# Altium PCB PCB1.PcbDoc
Units mm, origin at the board's own origin, x right, y up, seen from the top; angles counter-clockwise.
Board outline 52.5 x 34.6 mm, 4 copper layers (Top Layer, GND, Mid-Layer 1, Bottom Layer); 31 components, 42 nets, 287 pads, 133 vias.
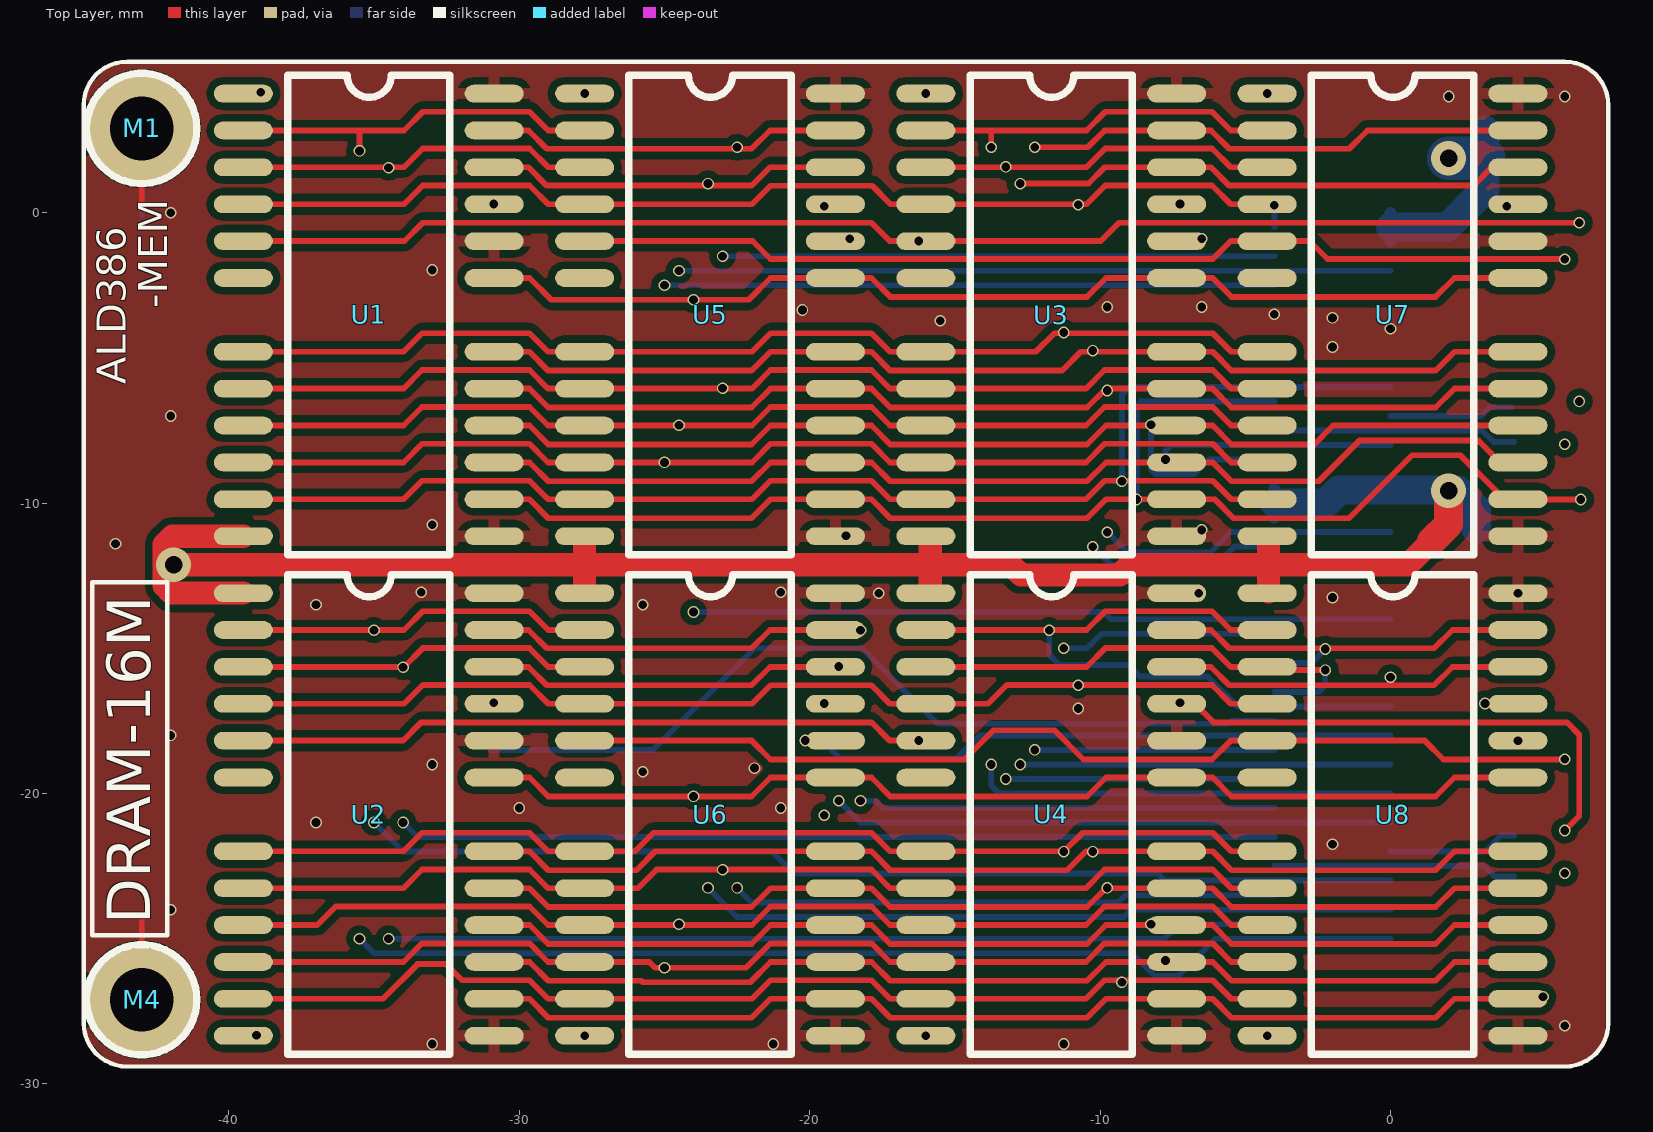
[diagram p0: Top Layer view]
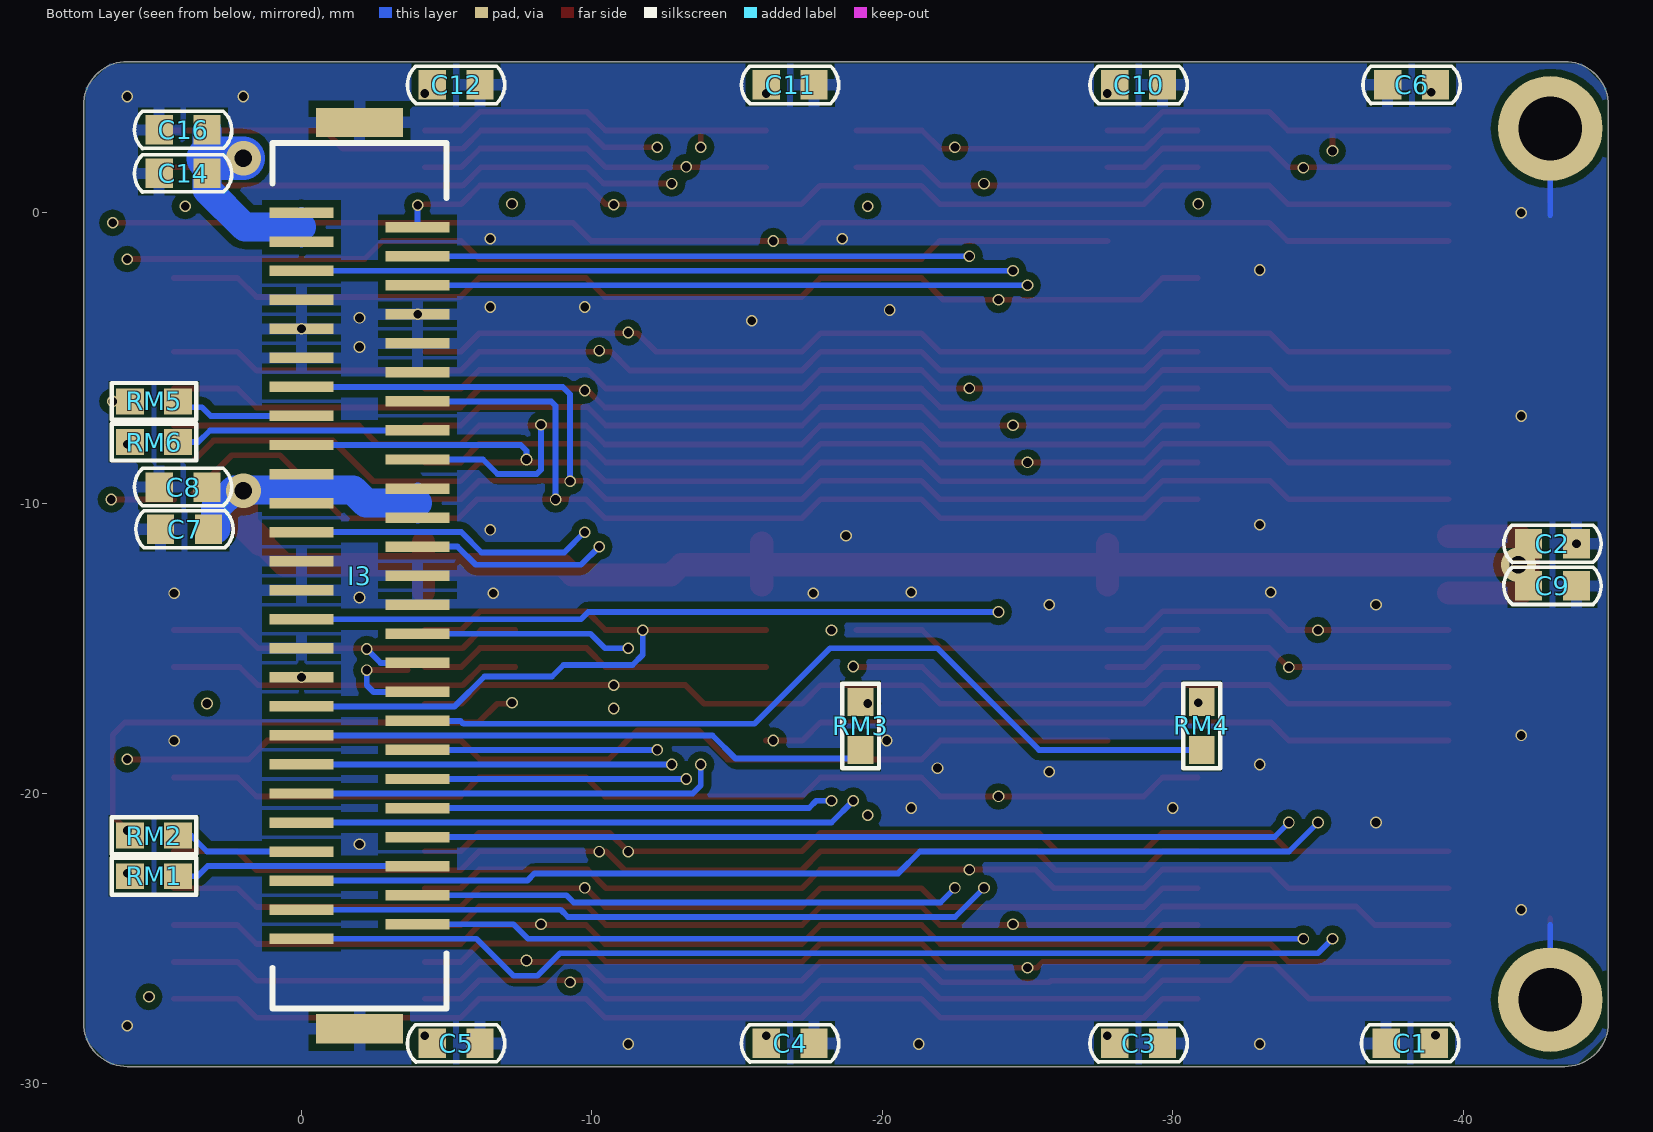
[diagram p1: Bottom Layer view, seen from below]
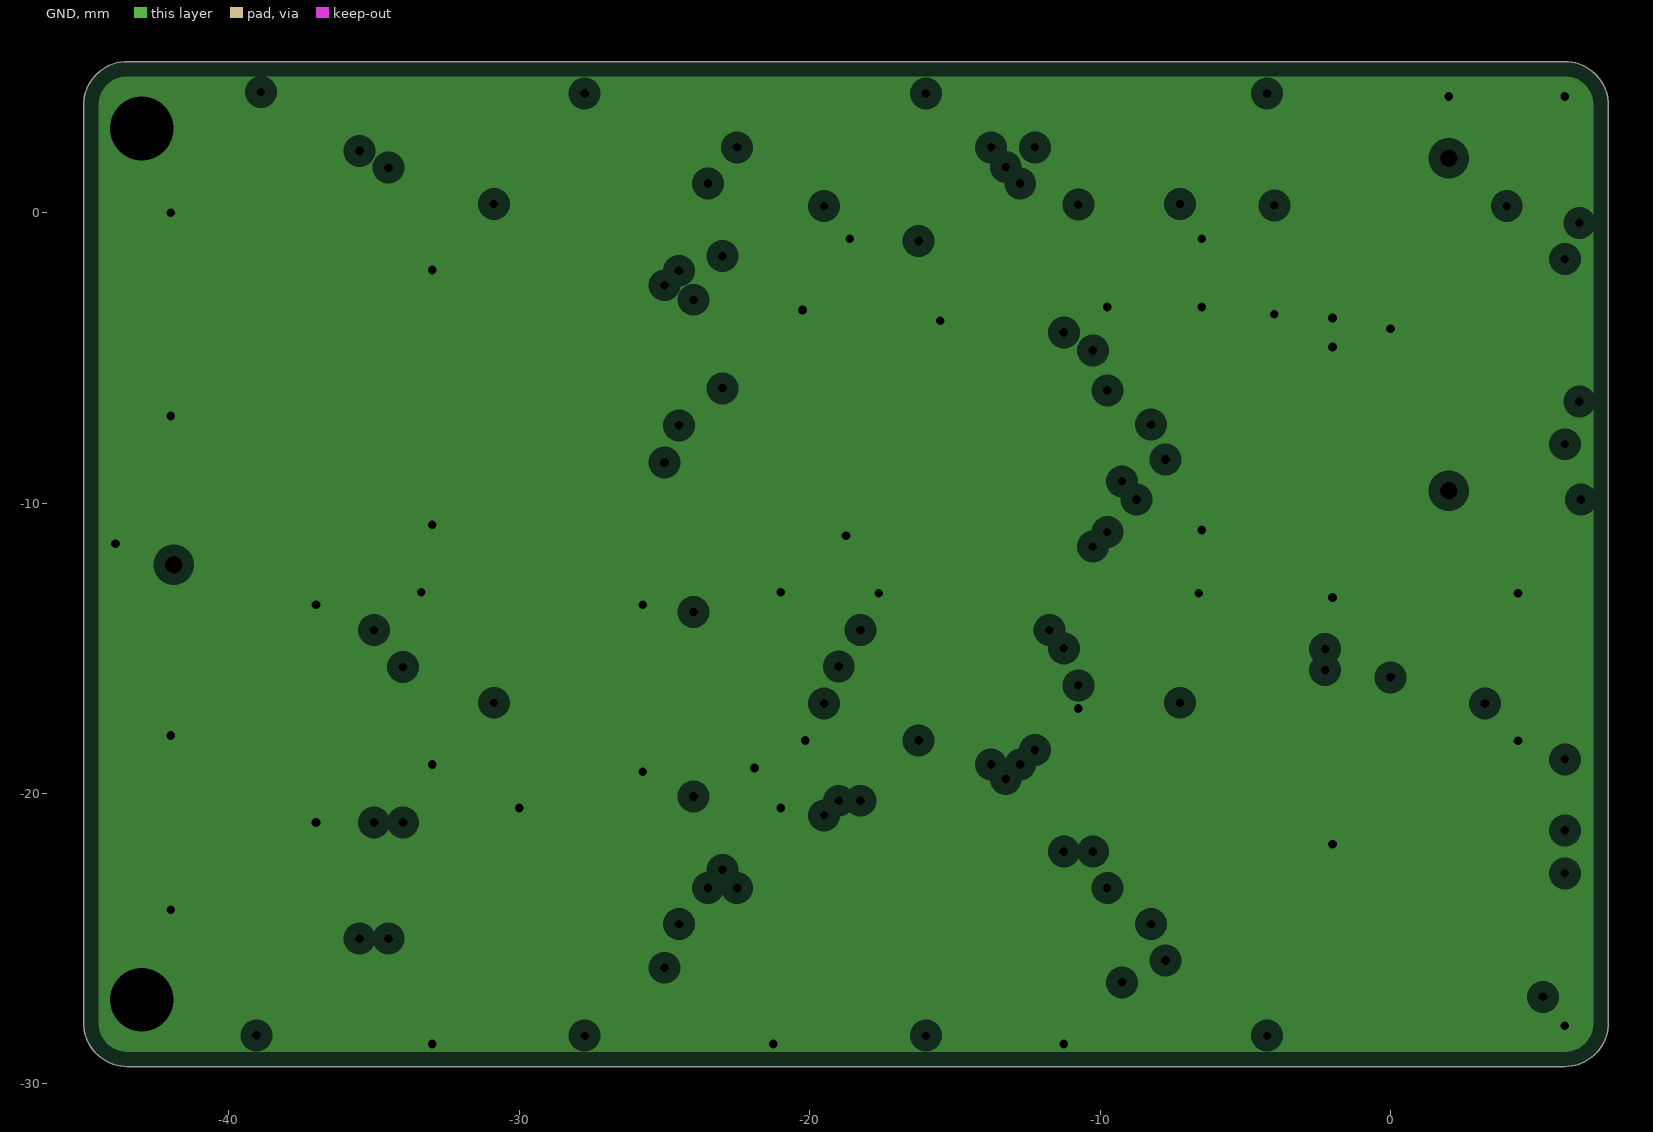
[diagram p2: GND, clearances drawn from the general rule]
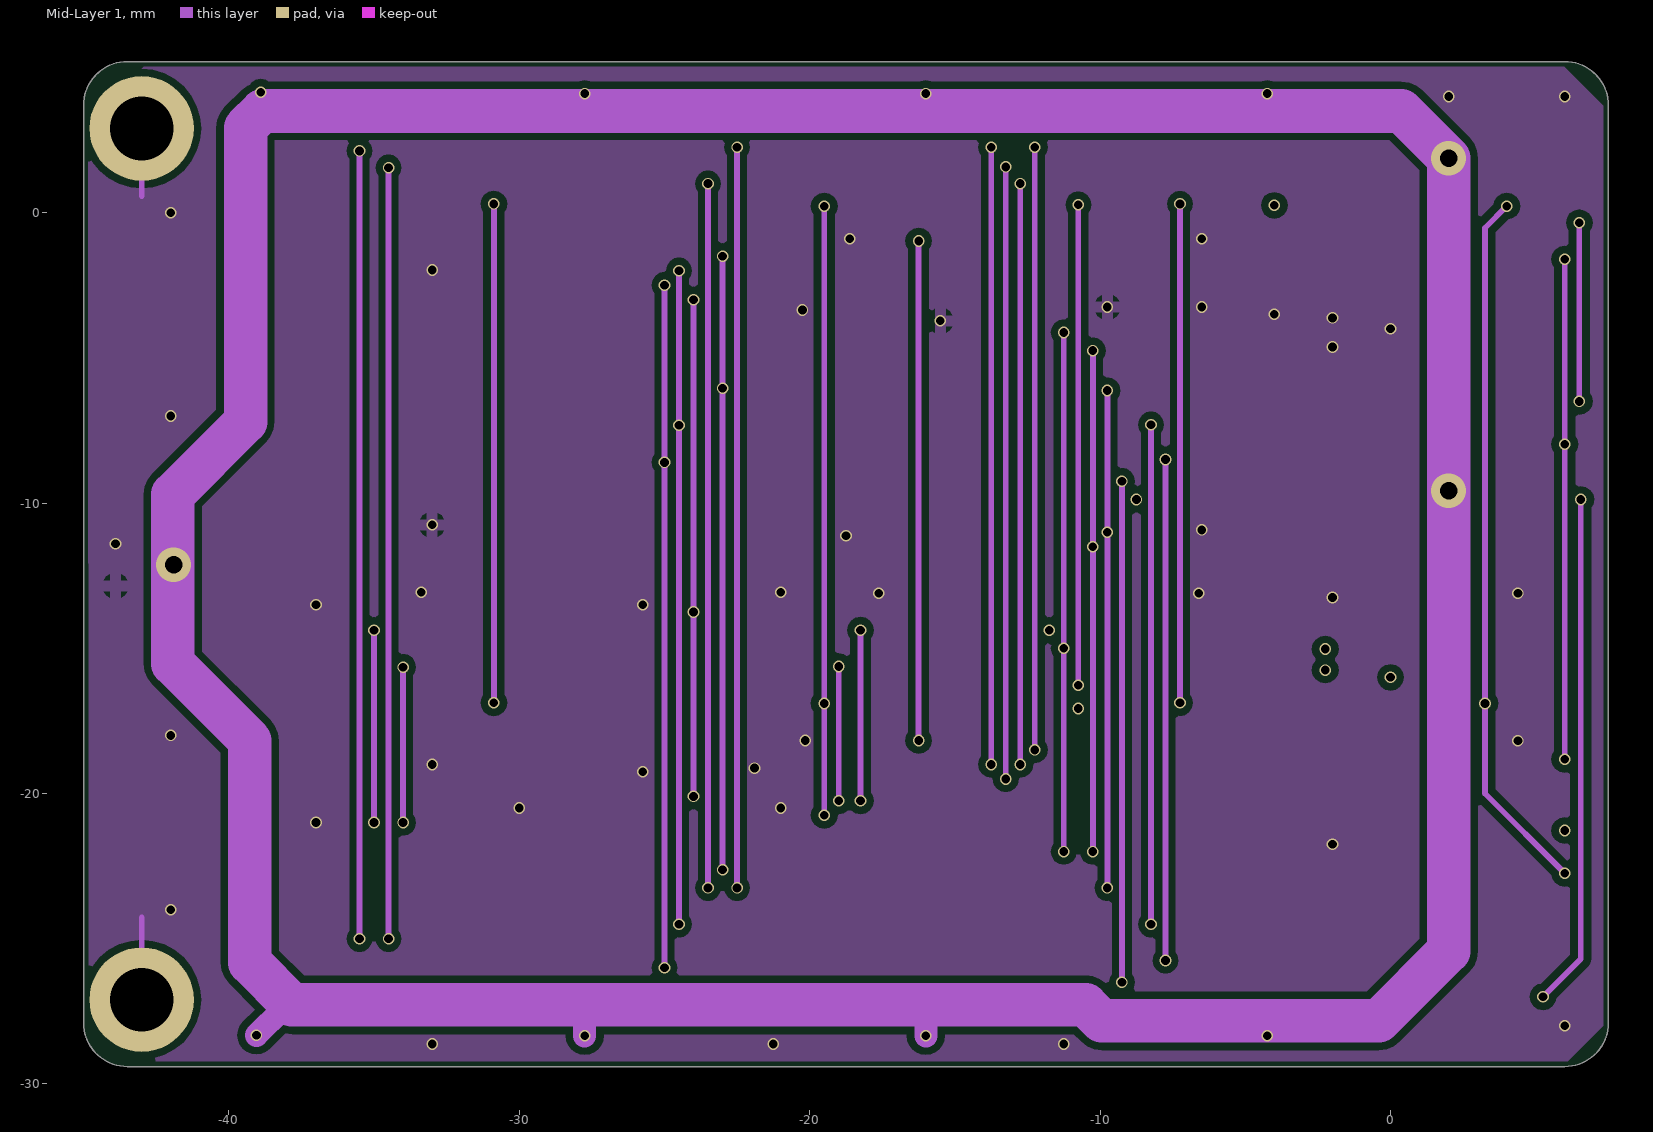
[diagram p3: Mid-Layer 1]

## Layer stack, top to bottom
Top Layer: signal copper 0.0356
Dielectric: core 0.32, FR-4, Dk 4.8
GND: plane copper 0.0356, net GND
Dielectric: prepreg 0.32, FR-4, Dk 4.8
Mid-Layer 1: signal copper 0.0356
Dielectric: core 0.32, FR-4, Dk 4.8
Bottom Layer: signal copper 0.0356

## Board outline
-45,-27.9 ccw(c-43.5,-27.9) -43.5,-29.4 6,-29.4 ccw(c6,-27.9) 7.5,-27.9 7.5,3.7 ccw(c6,3.7) 6,5.2 -43.5,5.2 ccw(c-43.5,3.7) -45,3.7

## Design rules (kind name [scope] priority, off if disabled: settings)
Clearance [All] p1: gap=0.2
ComponentClearance [All] p1: gap=0.254 collisioncheckmode=3 verticalgap=0.254
HoleSize [All] p1: absolutevalues=TRUE maxlimit=10 minlimit=0.2 maxpercent=80.000 minpercent=20.000
PlaneClearance [All] p1: clearance=0.4
PlaneConnect [All] p1: planeconnectstyle=Direct reliefexpansion=0.508 reliefentries=4 reliefconductorwidth=0.254 reliefairgap=0.254
PolygonConnect [All] p1: connectstyle=Relief reliefconductorwidth=0.4 reliefentries=4 polygonreliefangle="90 Angle"
RoutingVias [All] p1: holewidth=0.3 width=0.4 viastyle="Through Hole" minholewidth=0.3 minwidth=0.4 maxholewidth=0.3 maxwidth=0.4
SMDNeckDown [All] p1: percent=100.000
SolderMaskExpansion [All] p1: expansion=0.102
TestPointUsage [All] p1: valid=0 allowmultiple=FALSE
Testpoint [All] p1: side=15 testpointundercomponent=TRUE minsize=1.016 maxsize=2.54 preferedsize=1.524 minholesize=0 maxholesize=1.016 preferedholesize=0.813 testpointgrid=0.025 style=1023 order=0-112345678
Width [All] p1: maxlimit=3 minlimit=0.2 preferedwidth=0.254 toplayer_prefwidth=0.2 midlayer1_prefwidth=0.2 bottomlayer_prefwidth=0.2 minimp=50.000000 maximp=50.000000 favimp=50.000000
15 further rules are at their usual default settings.

## Components (designator, comment, footprint, x,y, rotation, side; value= is the part's Value field where it differs from the comment)
C1 "0.1uf" C0603 -39,-28.6 r0 bottom
C2 "0.1uf" C0603 -42.25,-11.4 r180 bottom
C3 "CAP" C0603 -28,-28.6 r180 bottom
C4 "CAP" C0603 -16,-28.6 r180 bottom
C5 "CAP" C0603 -4.5,-28.6 r180 bottom
C6 "CAP" C0603 -39.05,4.4 r0 bottom
C7 "CAP" C0603 3.2,-10.9 r0 bottom
C8 "CAP" C0603 3.25,-9.45 r0 bottom
C9 "CAP" C0603 -42.25,-12.85 r180 bottom
C10 "CAP" C0603 -28,4.4 r180 bottom
C11 "CAP" C0603 -16,4.4 r180 bottom
C12 "CAP" C0603 -4.5,4.4 r180 bottom
C14 "CAP" C0603 3.25,1.35 r0 bottom
C16 "CAP" C0603 3.25,2.85 r0 bottom
I3 "CON51P" BTB1.0-51P-b 0,0 r270 bottom
M1 "CON1" M2A -43,2.9 r0 top
M4 "CON1" M2A -43,-27.1 r0 top
RM1 "100" R0603 4.25,-22.85 r0 bottom
RM2 "100" R0603 4.25,-21.45 r0 bottom
RM3 "100" R0603 -19.25,-18.5 r90 bottom
RM4 "100" R0603 -31,-18.5 r90 bottom
RM5 "100" R0603 4.25,-6.5 r0 bottom
RM6 "100" R0603 4.25,-7.9 r0 bottom
U1 "DRAM-SOJ24" SOJ-24-A -39.5,4.1 r0 top
U2 "DRAM-SOJ24" SOJ-24-A -39.5,-13.1 r0 top
U3 "DRAM-SOJ24" SOJ-24-A -16,4.1 r0 top
U4 "DRAM-SOJ24" SOJ-24-A -16,-13.1 r0 top
U5 "DRAM-SOJ24" SOJ-24-A -27.75,4.1 r0 top
U6 "DRAM-SOJ24" SOJ-24-A -27.75,-13.1 r0 top
U7 "DRAM-SOJ24" SOJ-24-A -4.25,4.1 r0 top
U8 "DRAM-SOJ24" SOJ-24-A -4.25,-13.1 r0 top

## Footprints (in the part's own frame and the unit in brackets; to place one, negate y for a bottom-side part, rotate by r counter-clockwise, add the part's x,y. Pads: shape width x height; smd on the part's side, far side on the other; paste and mask are expansions set on the pad)
BTB1.0-51P-b [mm]
  rect 1x3 smd: 0(-3.1,2) 0(28.1,2)
  rect 0.36x2.2 smd: 1(0,0) 2(1,0) 3(2,0) 4(3,0) 5(4,0) 6(5,0) 7(6,0) 8(7,0) 9(8,0) 10(9,0) 11(10,0) 12(11,0) 13(12,0) 14(13,0) 15(14,0) 16(15,0) 17(16,0) 18(17,0) 19(18,0) 20(19,0) 21(20,0) 22(21,0) 23(22,0) 24(23,0) 25(24,0) 26(25,0) 27(24.5,4) 28(23.5,4) 29(22.5,4) 30(21.5,4) 31(20.5,4) 32(19.5,4) 33(18.5,4) 34(17.5,4) 35(16.5,4) 36(15.5,4) 37(14.5,4) 38(13.5,4) 39(12.5,4) 40(11.5,4) 41(10.5,4) 42(9.5,4) 43(8.5,4) 44(7.5,4) 45(6.5,4) 46(5.5,4) 47(4.5,4) 48(3.5,4) 49(2.5,4) 50(1.5,4) 51(0.5,4)
  silkscreen extent -2.4,-1 27.4,5
C0603 [mil]
  rect 37.01x40 smd: 1(0,0)
  rect 37x40 smd: 2(64.98,0)
  silkscreen extent -34,-25 98,25
M2A [mm]
  round 3.6 hole 2.2: 1(0,0)
  silkscreen extent -1.9,-1.9 1.9,1.9
R0603 [mil]
  rect 38x35 smd: 1(0,0) 2(65,0)
  silkscreen extent -25,-25 90,25
SOJ-24-A [mil] "薄贴片"
  oval 80x24 smd: 1(0,0) 2(0,-50) 3(0,-100) 4(0,-150) 5(0,-200) 6(0,-250) 7(0,-350) 8(0,-400) 9(0,-450) 10(0,-500) 11(0,-550) 12(0,-600) 13(340,-600) 14(340,-550) 15(340,-500) 16(340,-450) 17(340,-400) 18(340,-350) 19(340,-250) 20(340,-200) 21(340,-150) 22(340,-100) 23(340,-50) 24(340,0)
  silkscreen extent 60,-625 280,25

## Part data
C1 C2: library part CAP
RM1 RM2 RM3 RM4 RM5 RM6: library part RES2

## Via types
v1: diameter 0.4, hole 0.3, Top Layer to Bottom Layer, 130 vias
v2: diameter 1.2, hole 0.6, Top Layer to Bottom Layer, 3 vias

## Nets (pads, with @x,y where several pads share a name; then routed paths per layer and width w, separated by ;. In a path a pad name is that pad's centre, name@x,y a point inside that pad or via, vN(x,y) a via of type N, cw(c..) or ccw(c..) an arc to the next point about the centre after c; other vN are vias at no path point)
*CAS0: RM3.2 U5.21 U6.21 | length 21
  Mid-Layer 1 w0.2: v1(-19.5,-20.75) v1(-19.5,0.225)
  other v1: -19.5,-16.9
*CAS0_: I3.19 RM3.1 | length 19.7
  Bottom Layer w0.2: RM3.1 -18.95,-18.8 -14.95,-18.8 -14.15,-18 I3.19
*CAS1: RM1.2 U7.21 U8.21 | length 24.4
  Mid-Layer 1 w0.2: v1(4,0.225) 3.25,-0.525 3.25,-20 v1(6,-22.75)
  other v1: 3.25,-16.9
*CAS1_: I3.29 RM1.1 | length 8.4
  Bottom Layer w0.2: I3.29 3.225,-22.5 3.575,-22.85 RM1.1
*CAS2: RM4.2 U1.21 U2.21 | length 17.2
  Mid-Layer 1 w0.2: v1(-30.875,-16.875) v1(-30.875,0.3)
*CAS2_: I3.34 RM4.1 | length 29.6
  Bottom Layer w0.2: RM4.1 -25.4,-18.5 -21.9,-15 -18.2,-15 -15.6,-17.6 -5.575,-17.6 -5.475,-17.5 I3.34
*CAS3: RM2.2 U3.21 U4.21 | length 35
  Top Layer w0.2: U4.21 -6.74,-16.91 -6.1,-17.55 6.075,-17.55 6.5,-17.975 6.5,-20.775 v1(6,-21.275)
  Mid-Layer 1 w0.2: v1(-7.25,-16.875) v1(-7.25,0.3)
*CAS3_: I3.23 RM2.1 | length 4.5
  Bottom Layer w0.2: I3.23 3.25,-22 3.8,-21.45 RM2.1
*MWE: I3.51 U1.4 U2.4 U3.4 U4.4 U5.4 U6.4 U7.4 U8.4 | length 91
  Top Layer w0.2: U2.4 -33.97,-16.91 -33.325,-16.265 -29.65,-16.265 -29.005,-16.91 -21.985,-16.91 -21.35,-16.275 -17.875,-16.275 -17.24,-16.91 -13.86,-16.91 -13.215,-16.265 -6.15,-16.265 -5.505,-16.91 U8.4 ; U1.4 -33.97,0.29 -33.325,0.935 -29.65,0.935 -29.005,0.29 -21.985,0.29 -21.35,0.925 -17.85,0.925 -17.215,0.29 -10.47,0.29 -9.825,0.935 -6.15,0.935 -5.505,0.29 U7.4
  Mid-Layer 1 w0.2: v1(-10.75,-16.275) v1(-10.75,0.275)
  Bottom Layer w0.2: I3.51 v1(-4,0.25)
*RAS0: RM6.2 U5.5 U6.5 U7.5 U8.5 | length 87.1
  Top Layer w0.2: U6.5 -21.995,-18.18 -21.35,-18.825 -14.675,-18.825 -13.675,-17.825 -11.575,-17.825 -10.575,-18.825 -6.15,-18.825 -5.505,-18.18 1.18,-18.18 1.825,-18.825 v1(6,-18.825) ; U5.5 -21.97,-0.98 -21.35,-1.6 -6.125,-1.6 -5.505,-0.98 -2.795,-0.98 -2.175,-1.6 v1(6,-1.6)
  Mid-Layer 1 w0.2: v1(6,-18.825) v1(6,-1.6)
  other v1: 6,-7.975
*RAS0_: I3.44 RM6.1 | length 8.4
  Bottom Layer w0.2: I3.44 3.15,-7.5 3.55,-7.9 RM6.1
*RAS1: RM5.2 U1.5 U2.5 U3.5 U4.5 | length 94.2
  Top Layer w0.2: U2.5 -34.005,-18.18 -33.375,-17.55 -17.875,-17.55 -17.245,-18.18 U4.5 ; U1.5 -33.955,-0.98 -33.325,-0.35 -17.875,-0.35 -17.245,-0.98 -9.98,-0.98 -9.35,-0.35 v1(6.5,-0.35)
  Mid-Layer 1 w0.2: v1(-16.25,-18.175) v1(-16.25,-0.975) ; v1(6.5,-6.5) v1(6.5,-0.35)
*RAS1_: I3.8 RM5.1 | length 4.3
  Bottom Layer w0.2: I3.8 3.125,-7 3.425,-6.7 RM5.1@4.175,-6.7
A0: I3.50 U1.8 U2.8 U3.8 U4.8 U5.8 U6.8 U7.8 U8.8 | length 113.8
  Top Layer w0.2: U2.8 -33.99,-23.26 -33.35,-22.62 -29.65,-22.62 -29.01,-23.26 -25.91,-23.26 -25.27,-22.62 -17.875,-22.62 -17.235,-23.26 -10.49,-23.26 -9.85,-22.62 -6.125,-22.62 -5.485,-23.26 U8.8 ; U1.8 -33.99,-6.06 -33.35,-5.42 -29.65,-5.42 -29.01,-6.06 -21.99,-6.06 -21.35,-5.42 -17.875,-5.42 -17.235,-6.06 -10.49,-6.06 -9.85,-5.42 -6.125,-5.42 -5.485,-6.06 U7.8
  Mid-Layer 1 w0.2: v1(-23,-22.625) v1(-23,-1.5)
  Bottom Layer w0.2: v1(-23,-1.5) I3.50
  other v1: -23,-6.05
A1: I3.3 U1.9 U2.9 U3.9 U4.9 U5.9 U6.9 U7.9 U8.9 | length 120.7
  Top Layer w0.2: U2.9 -36.955,-24.53 -36.315,-23.89 -29.65,-23.89 -29.01,-24.53 -21.99,-24.53 -21.35,-23.89 -17.875,-23.89 -17.235,-24.53 -10.49,-24.53 -9.85,-23.89 -6.125,-23.89 -5.485,-24.53 U8.9 ; U1.9 -33.99,-7.33 -33.35,-6.69 -29.65,-6.69 -29.01,-7.33 -21.99,-7.33 -21.35,-6.69 -17.875,-6.69 -17.235,-7.33 -10.49,-7.33 -9.85,-6.69 -6.125,-6.69 -5.485,-7.33 U7.9
  Mid-Layer 1 w0.2: v1(-24.5,-24.5) v1(-24.5,-2)
  Bottom Layer w0.2: v1(-24.5,-2) I3.3
  other v1: -24.5,-7.325
A2: I3.49 U1.10 U2.10 U3.10 U4.10 U5.10 U6.10 U7.10 U8.10 | length 118.3
  Top Layer w0.2: U2.10 -33.99,-25.8 -33.35,-25.16 -29.65,-25.16 -29.01,-25.8 -25.525,-25.8 -25.325,-26 -22.19,-26 -21.35,-25.16 -17.875,-25.16 -17.235,-25.8 -10.49,-25.8 -9.85,-25.16 -6.125,-25.16 -5.485,-25.8 U8.10 ; U1.10 -33.99,-8.6 -33.35,-7.96 -29.65,-7.96 -29.01,-8.6 -21.99,-8.6 -21.35,-7.96 -17.875,-7.96 -17.235,-8.6 -10.49,-8.6 -9.85,-7.96 -6.125,-7.96 -5.485,-8.6 U7.10
  Mid-Layer 1 w0.2: v1(-25,-26) v1(-25,-2.5)
  Bottom Layer w0.2: v1(-25,-2.5) I3.49
  other v1: -25,-8.6
A3: I3.7 U1.11 U2.11 U3.11 U4.11 U5.11 U6.11 U7.11 U8.11 | length 103.7
  Top Layer w0.2: U2.11 -34.694,-27.07 -33.499,-25.875 -32.525,-25.875 -31.97,-26.43 -29.65,-26.43 -29.01,-27.07 -21.99,-27.07 -21.35,-26.43 -17.875,-26.43 -17.235,-27.07 -10.49,-27.07 -9.85,-26.43 -6.125,-26.43 -5.485,-27.07 U8.11 ; U1.11 -33.99,-9.87 -33.35,-9.23 -29.65,-9.23 -29.01,-9.87 -21.99,-9.87 -21.35,-9.23 -17.875,-9.23 -17.235,-9.87 -10.49,-9.87 -9.85,-9.23 -6.125,-9.23 -5.485,-9.87 U7.11
  Mid-Layer 1 w0.2: v1(-9.25,-26.5) v1(-9.25,-9.25)
  Bottom Layer w0.2: v1(-9.25,-9.25) -9.25,-6.25 -9,-6 I3.7
A4: I3.45 U1.14 U2.14 U3.14 U4.14 U5.14 U6.14 U7.14 U8.14 | length 102.2
  Top Layer w0.2: U2.14 -29.65,-27.07 -29,-27.72 -22,-27.72 -21.35,-27.07 -17.875,-27.07 -17.225,-27.72 -10.45,-27.72 -9.8,-27.07 -6.125,-27.07 -5.475,-27.72 1.55,-27.72 2.2,-27.07 U8.14 ; U1.14 -29.65,-9.87 -29,-10.52 -22,-10.52 -21.35,-9.87 -17.875,-9.87 -17.225,-10.52 -10.45,-10.52 -9.8,-9.87 -6.055,-9.87 -5.405,-10.52 -1.43,-10.52 0.74,-8.35 2.4,-8.35 U7.14@3.775,-9.725 ; U7.14@4.391,-9.875 v1(6.55,-9.875)
  Mid-Layer 1 w0.2: v1(5.25,-27) 6.55,-25.7 v1(6.55,-9.875)
  Bottom Layer w0.2: v1(-8.75,-9.875) -8.75,-6.65 -8.6,-6.5 I3.45
A5: I3.9 U1.15 U2.15 U3.15 U4.15 U5.15 U6.15 U7.15 U8.15 | length 99
  Top Layer w0.2: U2.15 -29.65,-25.8 -29,-26.45 -25.8,-26.45 -25.75,-26.5 -22.05,-26.5 -21.35,-25.8 -17.875,-25.8 -17.225,-26.45 -10.45,-26.45 -9.8,-25.8 -6.125,-25.8 -5.475,-26.45 1.55,-26.45 2.2,-25.8 U8.15 ; U1.15 -29.65,-8.6 -29,-9.25 -22,-9.25 -21.35,-8.6 -17.875,-8.6 -17.225,-9.25 -10.45,-9.25 -9.8,-8.6 -6.125,-8.6 -5.475,-9.25 -2.475,-9.25 -1.075,-7.85 3.025,-7.85 U7.15@3.65,-8.475
  Mid-Layer 1 w0.2: v1(-7.75,-25.75) v1(-7.75,-8.5)
  Bottom Layer w0.2: v1(-7.75,-8.5) -7.75,-8.2 -7.55,-8 I3.9
A6: I3.43 U1.16 U2.16 U3.16 U4.16 U5.16 U6.16 U7.16 U8.16 | length 97
  Top Layer w0.2: U2.16 -29.65,-24.53 -29,-25.18 -22,-25.18 -21.35,-24.53 -17.875,-24.53 -17.225,-25.18 -10.45,-25.18 -9.8,-24.53 -6.125,-24.53 -5.475,-25.18 1.55,-25.18 2.2,-24.53 U8.16 ; U1.16 -29.65,-7.33 -29,-7.98 -22,-7.98 -21.35,-7.33 -17.875,-7.33 -17.225,-7.98 -10.45,-7.98 -9.8,-7.33 -6.125,-7.33 -5.475,-7.98 -2.63,-7.98 -1.98,-7.33 U7.16
  Mid-Layer 1 w0.2: v1(-8.25,-24.5) v1(-8.25,-7.3)
  Bottom Layer w0.2: v1(-8.25,-7.3) -8.25,-8.85 -8.1,-9 -6.75,-9 -6.25,-8.5 I3.43
A7: I3.12 U1.17 U2.17 U3.17 U4.17 U5.17 U6.17 U7.17 U8.17 | length 101.2
  Top Layer w0.2: U2.17 -29.65,-23.26 -29,-23.91 -22,-23.91 -21.35,-23.26 -17.875,-23.26 -17.225,-23.91 -10.45,-23.91 -9.8,-23.26 -6.125,-23.26 -5.475,-23.91 1.55,-23.91 2.2,-23.26 U8.17 ; U1.17 -29.65,-6.06 -29,-6.71 -22,-6.71 -21.35,-6.06 -17.875,-6.06 -17.225,-6.71 -10.45,-6.71 -9.8,-6.06 -6.125,-6.06 -5.475,-6.71 1.55,-6.71 2.2,-6.06 U7.17
  Mid-Layer 1 w0.2: v1(-9.75,-23.25) v1(-9.75,-6.125)
  Bottom Layer w0.2: v1(-9.75,-11) -9.05,-11.7 -6.2,-11.7 -5.5,-11 I3.12
A8: I3.40 U1.18 U2.18 U3.18 U4.18 U5.18 U6.18 U7.18 U8.18 | length 97.7
  Top Layer w0.2: U2.18 -29.65,-21.99 -29,-22.64 -25.965,-22.64 -25.315,-21.99 -17.875,-21.99 -17.225,-22.64 -11.14,-22.64 -10.49,-21.99 -6.125,-21.99 -5.475,-22.64 1.55,-22.64 2.2,-21.99 U8.18 ; U1.18 -29.65,-4.79 -29,-5.44 -22,-5.44 -21.35,-4.79 -17.875,-4.79 -17.225,-5.44 -11.315,-5.44 -10.665,-4.79 -6.125,-4.79 -5.475,-5.44 1.55,-5.44 2.2,-4.79 U7.18
  Mid-Layer 1 w0.2: v1(-10.25,-22) v1(-10.25,-4.75)
  Bottom Layer w0.2: v1(-10.25,-11.5) -9.625,-12.125 -6,-12.125 -5.375,-11.5 I3.40
A9: I3.15 U1.19 U2.19 U3.19 U4.19 U5.19 U6.19 U7.19 U8.19 | length 115
  Top Layer w0.2: U2.19 -29.65,-19.45 -29,-20.1 -22,-20.1 -21.35,-19.45 -17.875,-19.45 -17.225,-20.1 -10.45,-20.1 -9.8,-19.45 -6.125,-19.45 -5.475,-20.1 1.55,-20.1 2.2,-19.45 U8.19 ; U1.19 -29.65,-2.25 -28.9,-3 -22.1,-3 -21.35,-2.25 -17.875,-2.25 -17.225,-2.9 -10.45,-2.9 -9.8,-2.25 -6.125,-2.25 -5.475,-2.9 1.55,-2.9 2.2,-2.25 U7.19
  Mid-Layer 1 w0.2: v1(-24,-20.1) v1(-24,-3)
  Bottom Layer w0.2: v1(-24,-13.75) -9.875,-13.75 -9.625,-14 I3.15
A10: I3.37 U1.7 U2.7 U3.7 U4.7 U5.7 U6.7 U7.7 U8.7 | length 99
  Top Layer w0.2: U2.7 -33.99,-21.99 -33.35,-21.35 -29.65,-21.35 -29.01,-21.99 -26.015,-21.99 -25.375,-21.35 -17.875,-21.35 -17.235,-21.99 -11.24,-21.99 -10.6,-21.35 -6.125,-21.35 -5.485,-21.99 U8.7 ; U1.7 -33.99,-4.79 -33.35,-4.15 -29.65,-4.15 -29.01,-4.79 -21.99,-4.79 -21.35,-4.15 -17.875,-4.15 -17.235,-4.79 -12.215,-4.79 -11.575,-4.15 -6.125,-4.15 -5.485,-4.79 U7.7
  Mid-Layer 1 w0.2: v1(-11.25,-22) v1(-11.25,-4.125)
  Bottom Layer w0.2: v1(-11.25,-15) -10.45,-15 -9.95,-14.5 I3.37
CD0: I3.26 U1.2 U5.2 | length 76.6
  Top Layer w0.2: U1.2 -33.97,2.83 -33.325,3.475 -29.65,3.475 -29.005,2.83 U5.2 ; v1(-35.5,2.125) -35.5,2.805
  Mid-Layer 1 w0.2: v1(-35.5,-25) v1(-35.5,2.125)
  Bottom Layer w0.2: v1(-35.5,-25) -35,-25.5 -8.9,-25.5 -8.125,-26.275 -7.3,-26.275 -6.025,-25 I3.26
CD1: I3.27 U1.3 U5.3 | length 69.5
  Top Layer w0.2: U1.3 -33.97,1.56 -33.325,2.205 -29.65,2.205 -29.005,1.56 U5.3
  Mid-Layer 1 w0.2: v1(-34.5,-25) v1(-34.5,1.55)
  Bottom Layer w0.2: v1(-34.5,-25) -7.8,-25 -7.3,-24.5 I3.27
CD2: I3.25 U1.22 U5.22 | length 60.5
  Top Layer w0.2: U1.22 -29.68,1.56 -29.05,0.93 -22,0.93 -21.37,1.56 U5.22
  Mid-Layer 1 w0.2: v1(-23.5,-23.25) v1(-23.5,1)
  Bottom Layer w0.2: v1(-23.5,-23.25) -22.5,-24.25 -9.175,-24.25 -8.925,-24 I3.25
CD3: I3.28 U1.23 U5.23 | length 56.6
  Top Layer w0.2: U1.23 -29.68,2.83 -29.05,2.2 -22,2.2 -21.37,2.83 U5.23
  Mid-Layer 1 w0.2: v1(-22.5,-23.25) v1(-22.5,2.25)
  Bottom Layer w0.2: v1(-22.5,-23.25) -22,-23.75 -9.375,-23.75 -9.125,-23.5 I3.28
CD4: I3.24 U2.2 U6.2 | length 54.7
  Top Layer w0.2: U2.2 -33.97,-14.37 -33.325,-13.725 -29.65,-13.725 -29.005,-14.37 U6.2
  Mid-Layer 1 w0.2: v1(-35,-21) v1(-35,-14.375)
  Bottom Layer w0.2: v1(-35,-21) -34,-22 -21.3,-22 -20.55,-22.75 -8.025,-22.75 -7.775,-23 I3.24
CD5: I3.30 U2.3 U6.3 | length 47.8
  Top Layer w0.2: U2.3 -33.97,-15.64 -33.325,-14.995 -29.65,-14.995 -29.005,-15.64 U6.3
  Mid-Layer 1 w0.2: v1(-34,-21) v1(-34,-15.65)
  Bottom Layer w0.2: v1(-34,-21) -33.5,-21.5 I3.30
CD6: I3.22 U2.22 U6.22 | length 36.2
  Top Layer w0.2: U2.22 -29.68,-15.64 -29.05,-16.27 -22,-16.27 -21.37,-15.64 U6.22
  Mid-Layer 1 w0.2: v1(-19,-20.25) v1(-19,-15.625)
  Bottom Layer w0.2: v1(-19,-20.25) -18.25,-21 I3.22
CD7: I3.31 U2.23 U6.23 | length 32.5
  Top Layer w0.2: U2.23 -29.68,-14.37 -29.05,-15 -22,-15 -21.37,-14.37 U6.23
  Mid-Layer 1 w0.2: v1(-18.25,-20.25) v1(-18.25,-14.375)
  Bottom Layer w0.2: v1(-18.25,-20.25) -17.725,-20.25 -17.475,-20.5 I3.31
CD8: I3.21 U3.2 U7.2 | length 48.7
  Top Layer w0.2: U3.2 -10.47,2.83 -9.825,3.475 -6.15,3.475 -5.505,2.83 U7.2 ; v1(-13.75,2.25) -13.75,2.83
  Mid-Layer 1 w0.2: v1(-13.75,-19) v1(-13.75,2.25)
  Bottom Layer w0.2: v1(-13.75,-19) -13.75,-19.725 -13.475,-20 I3.21
CD9: I3.32 U3.3 U7.3 | length 42.6
  Top Layer w0.2: U3.3 -10.47,1.56 -9.825,2.205 -6.15,2.205 -5.505,1.56 U7.3
  Mid-Layer 1 w0.2: v1(-13.25,-19.5) v1(-13.25,1.575)
  Bottom Layer w0.2: v1(-13.25,-19.5) I3.32
CD10: I3.20 U3.22 U7.22 | length 50.6
  Top Layer w0.2: v1(-12.75,1) -10.4,1 -9.84,1.56 -6.18,1.56 -5.55,0.93 2.855,0.93 3.485,1.56 U7.22
  Mid-Layer 1 w0.2: v1(-12.75,-19) v1(-12.75,1)
  Bottom Layer w0.2: v1(-12.75,-19) I3.20
CD11: I3.33 U3.23 U7.23 | length 46.4
  Top Layer w0.2: v1(-12.25,2.25) -10.425,2.25 -9.845,2.83 -6.18,2.83 -5.55,2.2 -1.425,2.2 -0.795,2.83 U7.23
  Mid-Layer 1 w0.2: v1(-12.25,-18.5) v1(-12.25,2.25)
  Bottom Layer w0.2: v1(-12.25,-18.5) I3.33
CD12: I3.18 U4.2 U8.2 | length 25.6
  Top Layer w0.2: U4.2 -10.47,-14.37 -9.825,-13.725 -6.15,-13.725 -5.505,-14.37 U8.2
  Bottom Layer w0.2: v1(-11.75,-14.375) -11.75,-15.225 -11.4,-15.575 -9.025,-15.575 -8.625,-15.975 -6.3,-15.975 -5.275,-17 I3.18
CD13: I3.35 U4.3 U8.3 | length 16.1
  Top Layer w0.2: U4.3 -10.47,-15.64 -9.825,-14.995 -6.15,-14.995 -5.505,-15.64 U8.3
  Top Layer w0.203: U8.3@-3.65,-15.75 v1(-2.25,-15.75)
  Bottom Layer w0.203: I3.35 -2.475,-16.5 -2.25,-16.275 v1(-2.25,-15.75)
CD14: I3.17 U4.22 U8.22 | length 12.5
  Top Layer w0.2: U4.22 -6.18,-15.64 -5.55,-16.27 1.5,-16.27 2.13,-15.64 U8.22 ; 0,-16.27 v1(0,-16)
CD15: I3.36 U4.23 U8.23 | length 14.2
  Top Layer w0.2: U4.23 -6.18,-14.37 -5.55,-15 1.5,-15 2.13,-14.37 U8.23
  Bottom Layer w0.203: I3.36 -2.725,-15.5 v1(-2.25,-15.025)
GND: C1.2 C2.2 C3.2 C4.2 C5.2 C6.2 C7.2 C8.2 C9.2 C10.2 C11.2 C12.2 C14.2 C16.2 I3.0 I3.4 I3.5 I3.6 I3.13 I3.14 I3.16 I3.38 I3.39 I3.46 I3.47 I3.48 M1.1 M4.1 U1.13 U1.20 U1.24 U2.13 U2.20 U2.24 U3.13 U3.20 U3.24 U4.13 U4.20 U4.24 U5.13 U5.20 U5.24 U6.13 U6.20 U6.24 U7.13 U7.20 U7.24 U8.13 U8.20 U8.24 | length 16
  Top Layer w0.203: M4.1 -43,-24.3 ; -43,0.375 M1.1
  Mid-Layer 1 w0.203: M4.1 -43,-24.275 ; -43,0.575 M1.1
  Bottom Layer w0.203: M4.1 -43,-24.525 ; -43,-0.075 M1.1
  other v1: -33,-28.625 -21.25,-28.625 -11.25,-28.625 6,-28 -42,-24 -2,-21.75 -37,-21 -30,-20.5 -21,-20.5 -25.75,-19.25 -21.9,-19.125 -33,-19 -20.15,-18.175 4.386,-18.18 -42,-18 -10.75,-17.075 -37,-13.5 -25.75,-13.5 -2,-13.25 -17.625,-13.1 -6.6,-13.1 4.386,-13.1 -33.375,-13.075 -21,-13.075 -43.9,-11.4 -18.75,-11.125 -6.5,-10.925 -33,-10.75 -42,-7 -2,-4.625 0,-4 -15.5,-3.725 -2,-3.625 -4,-3.5 -20.25,-3.35 -9.75,-3.25 -6.5,-3.25 -33,-1.975 -18.625,-0.9 -6.5,-0.9 -42,0 2,4 6,4
VCC: C1.1 C2.1 C3.1 C4.1 C5.1 C6.1 C7.1 C8.1 C9.1 C10.1 C11.1 C12.1 C14.1 C16.1 I3.1 I3.2 I3.10 I3.11 I3.41 I3.42 U1.1 U1.12 U2.1 U2.12 U3.1 U3.12 U4.1 U4.12 U5.1 U5.12 U6.1 U6.12 U7.1 U7.12 U8.1 U8.12 | length 221.4
  Top Layer w0.8: v2@-42.2,-12.125 -13.075,-12.125 -12.725,-12.475 -9.325,-12.475 -8.975,-12.125 0.6,-12.125 1.41,-11.315 ; U2.1 -41.975,-13.1 -42.225,-12.85 -42.225,-11.425 -41.94,-11.14 U1.12 ; U6.1@-27.75,-12.825 U5.12@-27.75,-11.425 ; U4.1@-15.85,-12.825 U3.12@-15.85,-11.375 ; U8.1@-4.2,-13.05 U7.12@-4.2,-11.35
  Top Layer w1: 1.41,-11.315 2,-10.725 v2(2,-9.575)
  Mid-Layer 1 w0.8: v1(-39.05,-28.325) -38.15,-27.425 ; v1(-27.75,-28.34) -27.75,-27.65 ; v1(-16,-28.34) -16,-27.55
  Mid-Layer 1 w1.5: -41.925,-15.53 -41.925,-9.7 -39.425,-7.2 -39.425,2.925 -38.85,3.5 0.375,3.5 v2(2,1.875) 2,-25.425 -0.4,-27.825 -9.945,-27.825 -10.495,-27.275 -37.825,-27.275 -39.275,-25.825 -39.275,-18.18 -41.925,-15.53
  Bottom Layer w0.4: I3.41 I3.42 ; I3.2 I3.1
  Bottom Layer w1: -4,-10 -2.225,-10 -1.775,-9.55 2.325,-9.55 2.95,-10.175 C7.1@2.95,-10.9 ; 0,-0.5 1.95,-0.5 3.25,0.8 C16.1
  Bottom Layer w1.5: v2(2,1.875) 3.2,1.875
  other v1: -4.25,-28.34 -27.75,4.1 -16,4.1 -4.25,4.1 -38.9,4.15
  other v2: -41.9,-12.125
pads on no net: U1.6 U2.6 U3.6 U4.6 U5.6 U6.6 U7.6 U8.6

## Polygon pours and split planes (outlines as drawn)
GND on Top Layer "Top Layer-No Net 1" (solid, remove dead copper): -44.95,-28.4 -44,-29.35 -43.375,-29.35 6.575,-29.35 7.425,-28.5 7.4,-28.5 7.4,4.375 6.675,5.1 6.65,5.125 6.5,5.125 -44.025,5.125 -44.95,4.2
GND on Mid-Layer 1 "Top Layer-No Net 1" (solid, remove dead copper): -44.825,-28.2 -43.8,-29.225 -41.975,-29.225 6.1,-29.225 7.325,-28 7.325,-27.925 7.325,3.675 5.975,5.025 -43.725,5.025 -44.85,3.9
GND on Bottom Layer "Top Layer-No Net 1" (solid, remove dead copper): -44.925,-28.325 -43.925,-29.325 -43.225,-29.325 6.575,-29.325 7.425,-28.475 7.425,4.3 6.6,5.125 -44.075,5.125 -44.925,4.275
GND on GND (split plane): -43.5,4.682 6,4.682 6.017,4.685 6.256,4.654 6.494,4.555 6.698,4.398 6.855,4.194 6.954,3.956 6.985,3.717 6.982,3.7 6.982,-27.9 6.985,-27.917 6.954,-28.156 6.855,-28.394 6.698,-28.598 6.494,-28.755 6.256,-28.854 6.017,-28.885 6,-28.882 -43.5,-28.882 -43.517,-28.885 -43.756,-28.854 -43.994,-28.755 -44.198,-28.598 -44.355,-28.394 -44.454,-28.156 -44.485,-27.917 -44.482,-27.9 -44.482,3.7 -44.485,3.717 -44.454,3.956 -44.355,4.194 -44.198,4.398 -43.994,4.555 -43.756,4.654 -43.517,4.685

## Silkscreen, mask and mechanical layers (free items; w line width, h text height)
Top Overlay:
  lines w0.15: 7.5,-27.9 cw(c6,-27.9) 6,-29.4 -43.5,-29.4 cw(c-43.5,-27.9) -45,-27.9 -45,3.7 cw(c-43.5,3.7) -43.5,5.2 6,5.2 cw(c6,3.7) 7.5,3.7 ; 7.5,-27.875 7.5,3.725 ; -44.7,-24.875 -44.7,-12.725 -42.125,-12.725 -42.125,-24.875 -44.7,-24.875
  text "-MEM" at -42.125,-3.3 h1 r90
  text "ALD386" at -43.55,-5.9 h1 r90
  text "DRAM-16M" at -42.7,-24.5 h1.5 r90